# EAGLE board Entradas analogicas de Potenciometros y Pulsadores (EAGLE 9.7.0)

Size 122.2 x 100.61 mm. Coordinates in mm from the lower left corner, seen from the top.
Outline: 0,0 122.2,0 122.2,100.61 0,100.61 0,0
Copper layers (1*16): Top 0.035mm / dielectric 1.5mm / Bottom 0.035mm
Design rules "default": minimum track width 6mil, minimum drill 0.35mm, track to track 6mil, track to pad 6mil, pad to pad 6mil, via to via 6mil, smd to smd 6mil, copper to edge 40mil, drill to drill 6mil, minimum pad ring 10mil, minimum via ring 8mil, stop-mask expansion 4mil, vias tented up to drill 0mil, thermal gap 10mil

## Footprints (pad centres in the part's own frame; a part is rotated, then mirrored left to right if it is on the bottom)
RESAD1016W63L850D250B = drill 0.83 pad 1.43: 1 -5.08,0; 2 5.08,0
HA-06-SM065 = drill 1 pad 1.676: 1 -2.54,-2.54; 2 0,2.54; 3 2.54,-2.54
SWITCH-MOMENTARY-PTH-6.5MM = drill 1.016 pad 1.88: 1 -3.251,2.261; 2 3.251,2.261; 3 -3.251,-2.261; 4 3.251,-2.261
ARDUINO-UNO-R3-SHIELD = drill 1.016 pad 1.88: 3.3V 24.13,-2.54; 5V 24.13,0; A0 24.13,12.7; A1 24.13,15.24; A2 24.13,17.78; A3 24.13,20.32; A4 24.13,22.86; A5 24.13,25.4; AREF -24.13,-13.97; D2 -24.13,20.32; D3 -24.13,17.78; D4 -24.13,15.24; D5 -24.13,12.7; D6 -24.13,10.16; D7 -24.13,7.62; D8 -24.13,3.81; D9 -24.13,1.27; D10 -24.13,-1.27; D11 -24.13,-3.81; D12 -24.13,-6.35; D13 -24.13,-8.89; GND@0 24.13,2.54; GND@1 24.13,5.08; GND@2 -24.13,-11.43; IOREF 24.13,-7.62; NC 24.13,-10.16; RES 24.13,-5.08; RX -24.13,25.4; SCL -24.13,-19.05; SDA -24.13,-16.51; TX -24.13,22.86; VIN 24.13,7.62

## Placement (x,y rotation side)
R1  1k  [RESAD1016W63L850D250B]  111.4,8.97 90 top
R2  1k  [RESAD1016W63L850D250B]  89.4,9.68 90 top
RPOT1  250k  [HA-06-SM065]  52.43,29.77 180 top
RPOT2  250k  [HA-06-SM065]  68.5,29.58 180 top
S1  SWITCH_MOMENTARY  [SWITCH-MOMENTARY-PTH-6.5MM]  113.94,17.86 90 top
S2  SWITCH_MOMENTARY  [SWITCH-MOMENTARY-PTH-6.5MM]  91.94,18.57 90 top
U1  ARDUINO-UNO-R3-SHIELD  [ARDUINO-UNO-R3-SHIELD]  47.88,70.77 270 top

## Library data of the parts
R1 R2 RPOT1 RPOT2 S1 S2 U1 = Tinkercad

## Nets
U1_3.3V: S1.3 S2.3 U1.3.3V
U1_5V: RPOT1.3 RPOT2.3 U1.5V
U1_A0: RPOT1.2 U1.A0
U1_A1: RPOT2.2 U1.A1
U1_A2: R1.2 S1.1 S1.2 U1.A2
U1_A3: R2.2 S2.1 S2.2 U1.A3
U1_GND: R1.1 R2.1 RPOT1.1 RPOT2.1 U1.GND@0 U1.GND@1 U1.GND@2

## Tracks (layer width: path | path; a pad name or v marks a point on that pad's centre or on a via)
U1_3.3V  (2 unrouted)
U1_5V  (2 unrouted)
U1_A0  (1 unrouted)
U1_A1  (1 unrouted)
U1_A2  (3 unrouted)
U1_A3  (3 unrouted)
U1_GND  (6 unrouted)